# Altium PCB PCB_PDB_OFA_v2.PcbDoc
Units mm, origin at the board's own origin, x right, y up, seen from the top; angles counter-clockwise.
Board outline 60 x 90 mm, 2 copper layers (Top Layer, Bottom Layer); 81 components, 28 nets, 212 pads, 0 vias.
Unrouted connection lines stored in the file: 156.
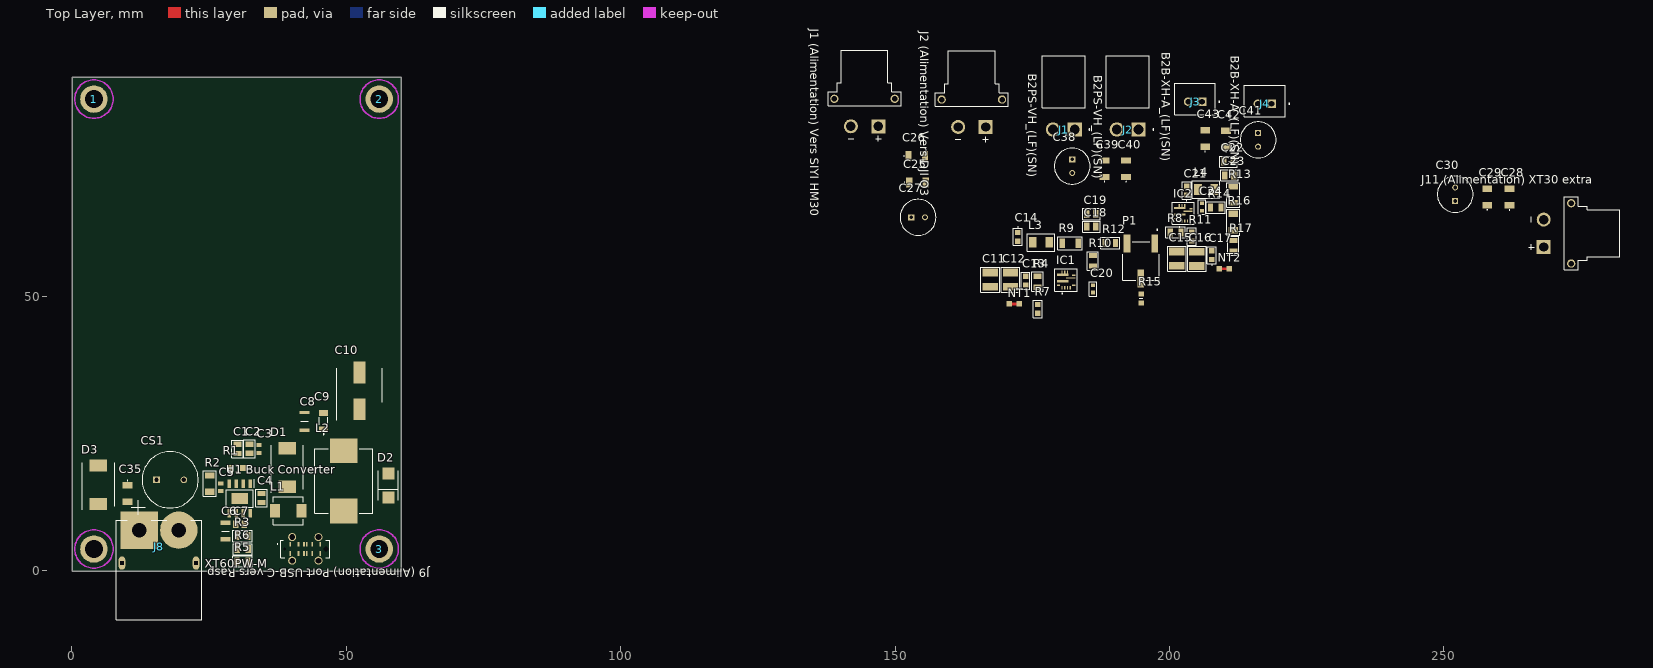
[diagram p0: Top Layer view]
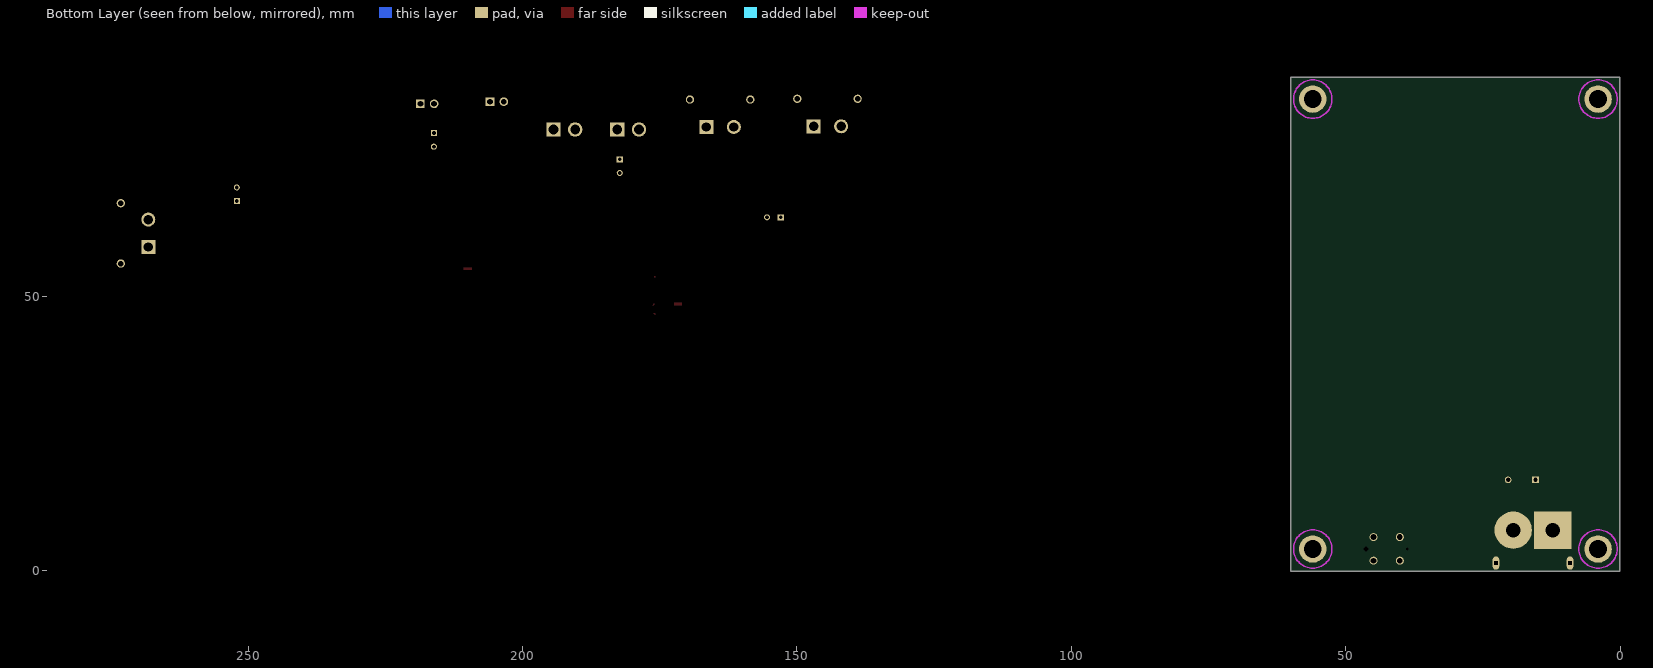
[diagram p1: Bottom Layer view, seen from below]

## Layer stack, top to bottom
Top Solder: solder mask 0.0102, Solder Resist, Dk 3.5
Top Layer: signal copper 0.0356
Dielectric 1: dielectric 0.32, FR-4, Dk 4.8
Bottom Layer: signal copper 0.0356
Bottom Solder: solder mask 0.0102, Solder Resist, Dk 3.5

## Board outline
60.005,-0.008 0.005,-0.008 0.005,89.992 60.005,89.992

## Design rules (kind name [scope] priority, off if disabled: settings)
Clearance [All] p1: gap=0.254 ignorepadtopadclearanceinfootprint=FALSE
PolygonConnect [All] p1: connectstyle=Relief reliefconductorwidth=0.254 reliefentries=4 polygonreliefangle="90 Angle" airgapwidth=0.254
RoutingVias [All] p1: holewidth=0.711 width=1.27 viastyle="Through Hole" minholewidth=0.711 minwidth=1.27 maxholewidth=0.711 maxwidth=1.27
SolderMaskExpansion [All] p1: expansion=0.102 istentingtop=FALSE
SupplyNets "Schematic Supply Nets" [InNet('PGND4')] p1: voltage=0.000
Width [All] p1: maxlimit=0.254 minlimit=0.254 preferedwidth=0.254
30 further rules are at their usual default settings.

## Components (designator, comment, footprint, x,y, rotation, side; value= is the part's Value field where it differs from the comment)
1 "Comment" "MH - Footprint" 4,86 r90 top
2 "Comment" "MH - Footprint" 56,86 r270 top
3 "Comment" "MH - Footprint" 56,4 r270 top
C1 "4.7 uF 50V" CAPC2012X145N 30.175,22.245 r270 top
C2 "4.7 uF 50V" CAPC2012X145N 32.35,22.275 r270 top
C3 "10nF 50V" CAPC1608X90N 34.1,22.24 r90 top
C4 "0.1uF 100V" CAPC2012X145N 34.525,13.3 r90 top
C5 "10nF 50V" CAPC1608X90N 27.1,15.25 r270 top
C6 "2200pF" CAPC3216X130N 28,7.25 r270 top
C7 "22 pF 50 V" CAPC2012X70N 30.625,8.525 r0 top
C8 "68uF" CAPC3216X180N 42.375,27.275 r90 top
C9 "100uF" GRM31x 45.85,27.325 r90 top
C10 "1000uF 6.3V" CAPAE830X1050N 52.4,32.825 r90 top
C11 "10uF" CAPC3225X280N 167.362,53.076 r90 top
C12 "10uF" CAPC3225X280N 171.045,53.076 r90 top
C13 "0.1uF" C0603 173.788,52.899 r90 top
C14 "0.1uF" C0603 172.389,60.9 r270 top
C15 "10uF" CAPC3225X280N 201.373,56.917 r90 top
C16 "10uF" CAPC3225X280N 205.03,56.892 r90 top
C17 "0.1uF" C0603 207.748,57.56 r90 top
C18 "22uF" CAPC2012X145N 185.775,62.754 r0 top
C19 "22uF" CAPC2012X145N 185.775,65.04 r0 top
C20 "100pF" GRM1885C1H101JA01D 186.054,51.426 r270 top
C21 "0.1uF" C0603 203.151,69.332 r90 top
C22 "22uF" CAPC2012X145N 210.771,74.59 r0 top
C23 "22uF" CAPC2012X145N 210.923,72.101 r0 top
C24 "100pF" GRM1885C1H101JA01D 205.919,66.31 r270 top
C25 "100nF" C1206 154.101,70.806 r0 top
C26 "4.7nF" C1206 153.974,75.632 r0 top
C27 "47uF 50V" CAPPRD250W50D655H1250 152.958,64.456 r0 top
C28 "100nF" C1206 262,68.164 r90 top
C29 "4.7nF" C1206 257.936,68.164 r90 top
C30 "47uF 50V" CAPPRD250W50D655H1250 252.094,67.402 r90 top
C35 "100nF" C1206 10.1,14.125 r270 top
C38 "47uF 50V" CAPPRD250W50D655H1250 182.297,75.033 r270 top
C39 "4.7nF" C1206 188.19,73.295 r90 top
C40 "100nF" C1206 192.127,73.295 r90 top
C41 "47uF 50V" CAPPRD250W50D655H1250 216.181,79.823 r270 top
C42 "4.7nF" C1206 210.339,78.757 r90 top
C43 "100nF" C1206 206.529,78.807 r90 top
CS1 "1000uF" CAPPRD500W60D1025H2150 15.4,16.6 r0 top
D1 "CDBC540-G" DIOM8059X290N 39.225,18.875 r90 top
D2 "6.0 V" SMBJ12A 57.675,15.6 r90 top
D3 "28V 1500W" DIOM7959X262N 4.8,15.725 r90 top
IC1 "TPS56637RPAR" TPS56637RPAR 181.18,53.026 r90 top
IC2 "TPS56637RPAR" TPS56637RPAR 202.555,65.178 r90 top
J1 "B2PS-VH_(LF)(SN)" JST_B2PS-VH_(LF)(SN) 180.771,80.458 r180 top
"J1 (Alimentation) Vers SIYI HM30" "XT30PW-F" AMASS_XT30PW-F 144.449,86.046 r0 top
J2 "B2PS-VH_(LF)(SN)" JST_B2PS-VH_(LF)(SN) 192.403,80.458 r180 top
"J2 (Alimentation) Vers DJI O3" "XT30PW-F" AMASS_XT30PW-F 164.007,85.919 r0 top
J3 "B2B-XH-A_(LF)(SN)" JST_B2B-XH-A_(LF)(SN) 204.687,86.046 r0 top
J4 "B2B-XH-A_(LF)(SN)" JST_B2B-XH-A_(LF)(SN) 217.387,85.665 r0 top
J8 "XT60PW-M" AMASS_XT60PW-M 15.86,1.437 r180 top
"J9 (Alimentation) Port USB-C vers Rasp" "USB4120-03-C" USB412003C 42.525,4.025 r0 top
"J11 (Alimentation) XT30 extra" "XT30PW-F" AMASS_XT30PW-F 273.227,61.535 r270 top
L1 "4.7uH" IND_ECS-MPIL0530-4R7MC 39.4,10.975 r0 top
L2 "22 uH" IND_104CDMCCDS_SUM 49.525,16.425 r90 top
L3 "3.3uH" INDM3225X240N 176.58,59.884 r0 top
L4 "3.3uH" INDM3225X240N 206.707,69.51 r180 top
NT1 "NetTie" NetTie 171.705,48.657 r180 top net-tie
NT2 "NetTie" NetTie 210.009,55.083 r180 top net-tie
P1 "50k" TRIM_3361P-1-503GLF 194.819,56.48 r270 top
R1 "536k" ERA6AEB101V 30.025,18.75 r180 top
R2 "100k" RESC3216X71N 25.1,15.9 r270 top
R3 "37.4k" RESC2012X50N 31.075,6.375 r0 top
R4 "169k" RESC2012X50N 175.947,52.721 r90 top
R5 "10.2k" RESC2012X50N 31.075,1.75 r180 top
R6 "1k96" RESC2012X50N 31.125,3.975 r0 top
R7 "36.1k" RESC1608X51N 175.998,47.768 r90 top
R8 "169k" RESC2012X50N 201.144,61.712 r180 top
R9 "49.9" RESC3016X65N 181.914,59.757 r180 top
R10 "20k" RESC2012X60N 186.054,56.506 r90 top
R11 "36.1k" RESC1608X51N 204.09,60.95 r90 top
R12 "42.7k" RESC2012X60N 189.231,59.782 r0 top
R13 "49.9" RESC3016X65N 211.634,68.545 r90 top
R14 "20k" RESC2012X60N 208.459,66.259 r0 top
R15 "7.5k" RESC1608X55N 194.845,49.66 r90 top
R16 "75k" RESC3216X75N 211.634,63.567 r90 top
R17 "10k" RESC2012X60N 211.66,59.259 r90 top
"U1 Buck Converter" "TPS54531DDAR" SOIC127P600X175-8N 30.6,13.2 r270 top
? "Comment" "MH - Footprint" 4,4 r90 top

## Footprints (in the part's own frame and the unit in brackets; to place one, negate y for a bottom-side part, rotate by r counter-clockwise, add the part's x,y. Pads: shape width x height; smd on the part's side, far side on the other; paste and mask are expansions set on the pad)
AMASS_XT30PW-F [mm]
  round 2.55 hole 1.7: N(-2.5,-5)
  rect 2.55x2.55 / inner round 2.55 / far side rect 2.55x2.55 hole 1.7: P(2.5,-5)
  round 1.508 hole 1: S1(5.5,0) S2(-5.5,0)
  silkscreen extent -6.65,-7.75 6.65,8.9, body extent -6.65,-6 6.65,8.9, height 5
AMASS_XT60PW-M [mm]
  rect 6.8x6.8 / inner round 6.8 / far side rect 6.8x6.8 hole 2.7: 1(3.6,-6)
  round 6.8 hole 2.7: 2(-3.6,-6)
  oval 1.2x2.4 hole 0.6 square: S1(6.75,0) S2(-6.75,0)
  silkscreen extent -7.75,-11.43 7.75,10.35, body extent -7.75,-7.85 7.75,10.35, height 8.4
C0603 [mm]
  rect 0.95x1 smd: 1(-0.8,0) 2(0.8,0)
  silkscreen extent -1.85,-0.8 1.58,0.8, body extent -0.87,-0.48 0.88,0.47, height 0.87
C1206 [mm]
  rect 1.15x1.8 smd: 1(-1.5,0) 2(1.5,0)
  silkscreen extent -2.4,-0.05 -2.3,0.05, body extent -1.7,-0.9 1.7,0.9, height 1.75
CAPAE830X1050N [mm]
  rect 4x2.15 smd: 1(-3.35,0) 2(3.35,0)
  silkscreen extent -5.35,-4.15 4.15,4.15, body extent -4.65,-4.25 4.65,4.25, height 10.5
CAPC1608X90N [mm]
  rect 0.73x0.94 smd: 1(-0.71,0) 2(0.71,0)
  body extent -0.8,-0.4 0.8,0.4, height 0.9
CAPC2012X70N [mm]
  rect 0.96x1.39 smd: 1(-0.79,0) 2(0.79,0)
  body extent -1,-0.63 1,0.63, height 0.7
CAPC2012X145N [mm]
  rect 0.97x1.47 smd: 1(-0.83,0) 2(0.83,0)
  silkscreen extent -1.6,-1.02 1.6,1.02, body extent -1,-0.63 1,0.63, height 1.45
CAPC3216X130N [mm]
  rect 0.82x1.82 smd: 1(-1.5,0) 2(1.5,0)
  silkscreen extent 0,-0.7 0,0.7, body extent -1.6,-0.8 1.6,0.8, height 1.3
CAPC3216X180N [mm]
  rect 0.62x1.82 smd: 1(-1.6,0) 2(1.6,0)
  silkscreen extent 0,-0.7 0,0.7, body extent -1.6,-0.8 1.6,0.8, height 1.6
CAPC3225X280N [mm]
  rect 1.43x2.82 smd: 1(-1.29,0) 2(1.29,0)
  silkscreen extent -2.3,-1.7 2.3,1.7, body extent -1.6,-1.25 1.6,1.25, height 2.8
CAPPRD250W50D655H1250 [mm]
  rect 1.1x1.1 hole 0.7: 1(0,0)
  round 1.1 hole 0.7: 2(2.5,0)
  silkscreen extent -2.02,-3.27 4.52,3.27, body extent -2.14,-3.4 4.65,3.4, height 12.5
CAPPRD500W60D1025H2150 [mm]
  rect 1.2x1.2 hole 0.8: 1(0,0)
  round 1.2 hole 0.8: 2(5,0)
  silkscreen extent -2.63,-5.12 7.63,5.12, body extent -2.75,-5.24 7.75,5.24, height 21.5
DIOM7959X262N [mm]
  rect 2.2x3.15 smd: 1(-3.5,0) 2(3.5,0)
  silkscreen extent -4.6,-2.95 3.97,2.95, body extent -3.97,-2.95 3.97,2.95, height 2.31
DIOM8059X290N [mm]
  rect 2.3x3.15 smd: 1(-3.5,0) 2(3.5,0)
  silkscreen extent -4.65,-2.95 4,2.95, body extent -4,-2.95 4,2.95, height 2.9
ERA6AEB101V [mm]
  rect 1.15x1.15 smd: 1(-1.175,0) 2(1.175,0)
  silkscreen extent -2.6,-0.63 0.2,0.63, body extent -1,-0.63 1,0.63, height 0.5
GRM31x [mm]
  rect 1.05x1.6 smd: 1(-1.475,0) 2(1.475,0)
  silkscreen extent -2.5,-0.8 0.7,0.8, body extent -1.6,-0.8 1.6,0.8, height 1
GRM1885C1H101JA01D [mm]
  rect 0.65x0.7 smd: 1(-0.675,0) 2(0.675,0)
  silkscreen extent -1.33,-0.67 1.33,0.67, body extent -0.8,-0.45 0.8,0.45, height 0.8
IND_104CDMCCDS_SUM [mm]
  rect 4.5x4.954 smd paste+0 mask+0: 1(-5.5,0) 2(5.5,0)
  silkscreen extent -5.88,-5.28 5.88,5.28, body extent -5.75,-5.16 5.75,5.16, height 3.99
IND_ECS-MPIL0530-4R7MC [mm]
  rect 1.8x2.5 smd: 1(-2.4,0) 2(2.4,0)
  silkscreen extent -2.75,-2.59 2.75,2.59, body extent -2.75,-2.59 2.75,2.59, height 3
INDM3225X240N [mm]
  rect 1.4x1.95 smd: 1(-1.5,0) 2(1.5,0)
  silkscreen extent -2.5,-1.6 2.5,1.6, body extent -1.6,-1.25 1.6,1.25, height 2.4
JST_B2B-XH-A_(LF)(SN) [mm]
  rect 1.575x1.575 / inner round 1.575 / far side rect 1.575x1.575 hole 1.05: 1(1.25,-0.525)
  round 1.575 hole 1.05: 2(-1.25,-0.525)
  silkscreen extent -3.7,-2.88 4.54,2.88, body extent -3.7,-2.88 3.7,2.88, height 7
JST_B2PS-VH_(LF)(SN) [mm]
  rect 2.625x2.625 / inner round 2.625 / far side rect 2.625x2.625 hole 1.75: 1(-1.98,0)
  round 2.625 hole 1.75: 2(1.98,0)
  silkscreen extent -4.78,-13.4 3.93,0.1, body extent -3.93,-14.9 3.93,0.57, height 8.5
"MH - Footprint" [mm]
  round 5 hole 3.25: MH(0,0)
  Keep-Out Layer circle w0.254: c0,0 r3.5
NetTie [mm]
  rect 1x1 smd mask-10: 1(-0.9,0) 2(0.9,0)
  Top Layer region: -0.75,-0.25 0.75,-0.25 0.75,0.25 -0.75,0.25
RESC1608X51N [mm]
  rect 0.95x1 smd: 1(-0.8,0) 2(0.8,0)
  silkscreen extent -1.58,-0.8 1.58,0.8, body extent -0.81,-0.41 0.81,0.41, height 0.51
RESC1608X55N [mm]
  rect 0.9x1 smd: 1(-0.8,0) 2(0.8,0)
  silkscreen extent 0,-0.33 0,0.33, body extent -0.8,-0.4 0.8,0.4, height 0.45
RESC2012X50N [mm]
  rect 0.95x1.45 smd: 1(-1,0) 2(1,0)
  silkscreen extent -1.78,-1.02 1.78,1.02, body extent -1.02,-0.63 1.02,0.63, height 0.5
RESC2012X60N [mm]
  rect 0.9x1.45 smd: 1(-0.95,0) 2(0.95,0)
  silkscreen extent -1.7,-1.02 1.7,1.02, body extent -1,-0.63 1,0.63, height 0.6
RESC3016X65N [mm]
  rect 1x1.75 smd: 1(-1.45,0) 2(1.45,0)
  silkscreen extent -2.25,-1.17 2.25,1.17, body extent -1.52,-0.78 1.53,0.77, height 0.55
RESC3216X71N [mil]
  rect 44x69 smd: 1(-58,0) 2(58,0)
  silkscreen extent -92,-46 92,46, body extent -61,-31 61,31, height 24
RESC3216X75N [mm]
  rect 1.2x1.8 smd: 1(-1.5,0) 2(1.5,0)
  silkscreen extent -2.4,-1.2 2.4,1.2, body extent -1.6,-0.8 1.6,0.8, height 0.75
SMBJ12A [mm]
  rect 2.2x2.15 smd: 1(-2.2,0) 2(2.2,0)
  silkscreen extent -2.68,-1.81 2.68,1.81, body extent -2.68,-1.86 2.68,1.86, height 2.33
SOIC127P600X175-8N [mm]
  rect 1.525x0.65 smd: 1(-2.712,1.905) 2(-2.712,0.635) 3(-2.712,-0.635) 4(-2.712,-1.905) 5(2.712,-1.905) 6(2.712,-0.635) 7(2.712,0.635) 8(2.712,1.905)
  rect 2x3 smd: 9(0,0)
  silkscreen extent -3.47,-2.45 1.6,2.58, body extent -3,-2.45 3,2.45, height 1.75
TPS56637RPAR [mm]
  rect 0.6x0.25 smd mask+0: 1(-1.4,0.75) 2(-1.4,0.25) 3(-1.4,-0.25) 4(-1.4,-0.75)
  rect 0.25x0.6 smd mask+0: 5(-0.93,-1.4) 7(0.87,-1.4) 10(-0.93,1.4)
  rect 0.25x1.7 smd mask+0: 6(0.37,-0.85)
  rect 0.4x2.1 smd mask+0: 8(0.95,0.65) 9(-0.21,0.65)
  rect 0.56x0.25 smd mask+0: 11(1.42,-0.25) 12(1.42,0.25) 13(1.42,0.75)
  silkscreen extent -2.5,-2.02 2.02,2.02, body extent -1.55,-1.55 1.55,1.55, height 1
TRIM_3361P-1-503GLF [mm]
  rect 3.3x1.19 smd: 1(-3.2,2.54) 2(3.2,0) 3(-3.2,-2.54)
  silkscreen extent -5.8,-3.35 3.52,3.35, body extent -4.27,-3.35 4.27,3.35, height 5.84
USB412003C [mm]
  rect 0.3x0.87 smd: A1(-2.75,0.865) A4(-1.25,0.865) A6(-0.25,0.865) A7(0.25,0.865) A9(1.25,0.865) A12(2.75,0.865) B1(2.75,-0.865) B4(1.25,-0.865) B6(0.25,-0.865) B7(-0.25,-0.865) B9(-1.25,-0.865) B12(-2.75,-0.865)
  round 1.46 hole 1.04: MH1(-2.4,2.15) MH2(2.4,2.15) MH3(2.4,-2.15) MH4(-2.4,-2.15)
  round 0.26 hole 0.52 unplated: MH5(-3.75,0)
  round 0.445 hole 0.89 unplated: MH6(3.75,0)
  silkscreen extent -5.1,-1.58 4.47,1.58, body extent -4.47,-2.3 4.47,2.3, height 6.5

## Part data
C1 C2: library part GRM21BR61H475KE51L, "Capacitor", Manufacturer_Name="Murata Electronics", Mouser Part Number=81-GRM21BR61H475KE1L, Arrow Part Number=GRM21BR61H475KE51L, Arrow Price/Stock=https://www.arrow.com/en/products/grm21br61h475ke51l/murata-manufacturing?region=nac, Datasheet Link=https://search.murata.co.jp/Ceramy/image/img/A01X/G101/ENG/GRM21BR61H475KE51-01A.pdf, Height=1.45mm, Manufacturer_Part_Number=GRM21BR61H475KE51L, Mouser Price/Stock=https://www.mouser.co.uk/ProductDetail/Murata-Electronics/GRM21BR61H475KE51L?qs=eeBpzGFlv%252B%252BOtLzDC1PY6Q%3D%3D
C3 C5: library part CL10B103KB8NNNC, "Capacitor", Manufacturer_Name=SAMSUNG, Mouser Part Number=187-CL10B103KB8NNNC, Arrow Part Number=CL10B103KB8NNNC, Arrow Price/Stock=https://www.arrow.com/en/products/cl10b103kb8nnnc/samsung-electro-mechanics?utm_currency=USD&region=europe, Datasheet Link=https://product.samsungsem.com/mlcc/CL10B103KB8NNN.do, Height=0.9mm, Manufacturer_Part_Number=CL10B103KB8NNNC, Mouser Price/Stock=https://www.mouser.co.uk/ProductDetail/Samsung-Electro-Mechanics/CL10B103KB8NNNC?qs=349EhDEZ59pAsZxZjVI0UQ%3D%3D
C4: library part C2012X7R2A104K125AA, "Capacitor", Manufacturer_Name=TDK, Mouser Part Number=810-C2012X7R2A104K, Arrow Part Number=C2012X7R2A104K125AA, Arrow Price/Stock=https://www.arrow.com/en/products/c2012x7r2a104k125aa/tdk?region=europe, ClassName=PowerModul, Datasheet Link=https://product.tdk.com/info/en/catalog/datasheets/mlcc_commercial_midvoltage_en.pdf, Height=1.45mm, Manufacturer_Part_Number=C2012X7R2A104K125AA, Mouser Price/Stock=https://www.mouser.co.uk/ProductDetail/TDK/C2012X7R2A104K125AA?qs=NRhsANhppD9J0ZsT2%2Fo%2F7Q%3D%3D
C6: library part CGA5H4C0G2J222J115AA, "Capacitor 2200pF 630V", Manufacturer_Name=TDK, Datasheet Link=http://docs-europe.electrocomponents.com/webdocs/14e9/0900766b814e9125.pdf, Height=1.3mm, Manufacturer_Part_Number=CGA5H4C0G2J222J115AA
C7: library part CC0805JRNPO9BN220, "Capacitor", Manufacturer_Name=YAGEO, Mouser Part Number=603-CC805JRNPO9BN220, Datasheet Link=https://componentsearchengine.com/Datasheets/2/CC0805JRNPO9BN220.pdf, Height=0.7mm, Manufacturer_Part_Number=CC0805JRNPO9BN220, Mouser Price/Stock=https://www.mouser.co.uk/ProductDetail/YAGEO/CC0805JRNPO9BN220?qs=vTakOoo5QyK71b5vkghGmg%3D%3D
C8: library part C3216X5R0J686M160AB, "Capacitor de 68uF", Manufacturer_Name=TDK, Mouser Part Number=810-C3216X5R0J686M1B, Arrow Part Number=C3216X5R0J686M160AB, Arrow Price/Stock=https://www.arrow.com/en/products/c3216x5r0j686m160ab/tdk?utm_currency=USD&region=nac, Datasheet Link=https://product.tdk.com/info/en/catalog/datasheets/mlcc_commercial_midvoltage_en.pdf, Height=1.8mm, Manufacturer_Part_Number=C3216X5R0J686M160AB, Mouser Price/Stock=https://www.mouser.co.uk/ProductDetail/TDK/C3216X5R0J686M160AB?qs=xLDY6iXSiQYzVupG6zVrXw%3D%3D
C9: library part GRM31CR60J107KEA8L, "Capacitor", Manufacturer_Name="Murata Electronics", Mouser Part Number=81-GRM31CR60J107KE8L, Arrow Part Number=GRM31CR60J107KEA8L, Arrow Price/Stock=https://www.arrow.com/en/products/grm31cr60j107kea8l/murata-manufacturing?utm_currency=USD&region=europe, Datasheet Link=https://search.murata.co.jp/Ceramy/image/img/A01X/G101/ENG/GRM31CR60J107KEA8-01A.pdf, Height=1.25mm, Manufacturer_Part_Number=GRM31CR60J107KEA8L, Mouser Price/Stock=https://www.mouser.co.uk/ProductDetail/Murata-Electronics/GRM31CR60J107KEA8L?qs=pUKx8fyJudDzdyEEakAKPA%3D%3D
C10: library part UCD0J102MNL1GS, "Capacitor Polarised", Manufacturer_Name=Nichicon, Mouser Part Number=647-UCD0J102MNL1GS, Arrow Part Number=UCD0J102MNL1GS, Arrow Price/Stock=https://www.arrow.com/en/products/ucd0j102mnl1gs/nichicon, Datasheet Link=https://www.nichicon.co.jp/english/products/pdfs/e-ucd.pdf, Height=10.5mm, Manufacturer_Part_Number=UCD0J102MNL1GS, Mouser Price/Stock=https://www.mouser.co.uk/ProductDetail/Nichicon/UCD0J102MNL1GS?qs=c0uEScvPYN2yS0opD8R0vQ%3D%3D
C11 C12 C15 C16: library part AGC1210X7R500-106KNE, "Capacitor", Manufacturer_Name=Venkel, Datasheet Link=https://data.venkel.com/documents/agc-series?force=1, Height=2.8mm, Manufacturer_Part_Number=AGC1210X7R500-106KNE
C13 C14 C17 C21: library part C0603C104K5RACTU, "Capacitor", Manufacturer_Name=KEMET, Mouser Part Number=80-C0603C104K5R, Arrow Part Number=C0603C104K5RACTU, Arrow Price/Stock=https://www.arrow.com/en/products/c0603c104k5ractu/kemet-corporation?utm_currency=USD&region=nac, Datasheet Link=https://content.kemet.com/datasheets/KEM_C1002_X7R_SMD.pdf, Height=0.87mm, Manufacturer_Part_Number=C0603C104K5RACTU, Mouser Price/Stock=https://www.mouser.co.uk/ProductDetail/KEMET/C0603C104K5RACTU?qs=l5k%252BbMnNDkkVcnZPSAaaiQ%3D%3D
C18 C19 C22 C23: library part C2012X5R1V226M125AC, "Capacitor, 35V", Manufacturer_Name=TDK, Mouser Part Number=810-C2012X5R1V226MAC, Arrow Part Number=C2012X5R1V226M125AC, Arrow Price/Stock=https://www.arrow.com/en/products/c2012x5r1v226m125ac/tdk?utm_currency=USD&region=nac, Datasheet Link=https://product.tdk.com/info/en/catalog/datasheets/mlcc_commercial_midvoltage_en.pdf, Height=1.45mm, Manufacturer_Part_Number=C2012X5R1V226M125AC, Mouser Price/Stock=https://www.mouser.co.uk/ProductDetail/TDK/C2012X5R1V226M125AC?qs=6JAMGB%252BEdkyUk0d2Mu2IrQ%3D%3D
C20 C24: library part GRM1885C1H101JA01D, "Capacitor", Manufacturer_Name="Murata Electronics", Mouser Part Number=81-GRM39C101J50, Arrow Part Number=GRM1885C1H101JA01D, Arrow Price/Stock=https://www.arrow.com/en/products/grm1885c1h101ja01d/murata-manufacturing?utm_currency=USD&region=europe, Datasheet Link=https://search.murata.co.jp/Ceramy/image/img/A01X/G101/ENG/GRM1885C1H101JA01-01A.pdf, Height=0.9mm, Manufacturer_Part_Number=GRM1885C1H101JA01D, Mouser Price/Stock=https://www.mouser.co.uk/ProductDetail/Murata-Electronics/GRM1885C1H101JA01D?qs=H3lwsW1hsDt1I4guwPQ00A%3D%3D
C25 C28 C35 C40 C43: library part C1206C104K1RACTU, "Capacitor, 100V max", Manufacturer_Name=KEMET, Mouser Part Number=80-C1206C104K1R, Arrow Part Number=C1206C104K1RACTU, Arrow Price/Stock=https://www.arrow.com/en/products/c1206c104k1ractu/kemet-corporation?region=nac, Datasheet Link=https://content.kemet.com/datasheets/KEM_C1002_X7R_SMD.pdf, Manufacturer_Part_Number=C1206C104K1RACTU, Mouser Price/Stock=https://www.mouser.co.uk/ProductDetail/KEMET/C1206C104K1RACTU?qs=zXJuHl05TF3PSnPdHxXWPA%3D%3D
C26 C29 C39 C42: library part C1206C472K5RACTU, "Capacitor, 50V max", Manufacturer_Name=KEMET, Mouser Part Number=80-C1206C472K5R, Arrow Part Number=C1206C472K5RACTU, Arrow Price/Stock=https://www.arrow.com/en/products/c1206c472k5ractu/kemet-corporation?utm_currency=USD&region=nac, Datasheet Link=https://content.kemet.com/datasheets/KEM_C1002_X7R_SMD.pdf, Manufacturer_Part_Number=C1206C472K5RACTU, Mouser Price/Stock=https://www.mouser.co.uk/ProductDetail/KEMET/C1206C472K5RACTU?qs=mFbQsTr%2Fh7%2F0OG5diKY6aA%3D%3D
C27 C30 C38 C41: library part 50YXJ47M6.3X11, "Capacitor Polarised, 47uF, 50V", Manufacturer_Name=Rubycon, Mouser Part Number=232-50YXJ47M6.3X11, Datasheet Link=https://www.mouser.co.uk/datasheet/2/977/e_YXJ-1601195.pdf, Height=12.5mm, Manufacturer_Part_Number=50YXJ47M6.3X11, Mouser Price/Stock=https://www.mouser.co.uk/ProductDetail/Rubycon/50YXJ47M6.3X11?qs=T3oQrply3y9Y%2FB9KKPf5JQ%3D%3D
CS1: library part 35PX1000MEFC10X20, "Capacitor Polarised", Manufacturer_Name=Rubycon, Mouser Part Number=232-35PX1000MEFC10X2, Arrow Part Number=35PX1000MEFC10X20, Arrow Price/Stock=https://www.arrow.com/en/products/35px1000mefc10x20/rubycon?region=nac, Datasheet Link=https://www.rubycon.co.jp/wp-content/uploads/catalog-aluminum/PX.pdf, Height=21.5mm, Manufacturer_Part_Number=35PX1000MEFC10X20, Mouser Price/Stock=https://www.mouser.co.uk/ProductDetail/Rubycon/35PX1000MEFC10X20?qs=T3oQrply3y86%2F1qnNfO%252BAA%3D%3D
D1: "Diode", Manufacturer_Name="Comchip Technology", Mouser Part Number=750-CDBC540-G, Arrow Part Number=CDBC540-G, Arrow Price/Stock=https://www.arrow.com/en/products/cdbc540-g/comchip-technology?utm_currency=USD&region=nac, Datasheet Link=https://eu.mouser.com/datasheet/2/80/CDBC520-HF_Thru195340._CDBC5100-HF_RevB-1480991.pdf, Height=2.9mm, Manufacturer_Part_Number=CDBC540-G, Mouser Price/Stock=https://www.mouser.co.uk/ProductDetail/Comchip-Technology/CDBC540-G?qs=tw%252BuQ%2FB6PO2ExpPYY64Vzw%3D%3D
D2: library part SMBJ6.0A, "TVS Diode (Uni-directional)", Manufacturer_Name=STMicroelectronics, Datasheet Link=https://www.st.com/resource/en/datasheet/smbj12a.pdf, Height=2.45mm, Manufacturer_Part_Number=SMBJ6.0A
D3: library part SMCJ28A, "TVS Diode, 1500W, 28V", Manufacturer_Name=Bourns, Mouser Part Number=652-SMCJ28A, Arrow Part Number=SMCJ28A, Arrow Price/Stock=https://www.arrow.com/en/products/smcj28a/bourns?region=nac, Datasheet Link=https://componentsearchengine.com/Datasheets/2/SMCJ28A.pdf, Height=2.62mm, Manufacturer_Part_Number=SMCJ28A, Mouser Price/Stock=https://www.mouser.co.uk/ProductDetail/Bourns/SMCJ28A?qs=%252Bf8Cd6aE5bxVNvhMry4%2FeQ%3D%3D
IC1 IC2: "Integrated Circuit", Manufacturer_Name="Texas Instruments", Mouser Part Number=595-TPS56637RPAR, Arrow Part Number=TPS56637RPAR, Arrow Price/Stock=https://www.arrow.com/en/products/tps56637rpar/texas-instruments?utm_currency=USD&region=nac, Datasheet Link=https://www.ti.com/lit/gpn/TPS56637, Height=1mm, Manufacturer_Part_Number=TPS56637RPAR, Mouser Price/Stock=https://www.mouser.co.uk/ProductDetail/Texas-Instruments/TPS56637RPAR?qs=9r4v7xj2LnkQ0Y9HL0qmSA%3D%3D
J1 J2: "Connector Header Through Hole, Right Angle 2 position 0.156 (3.96mm)", Package=None, Check_prices=https://www.snapeda.com/parts/B2PS-VH%20(LF)(SN)/JST/view-part/?ref=eda, MF=JST, MP="B2PS-VH (LF)(SN)", SnapEDA_Link=https://www.snapeda.com/parts/B2PS-VH%20(LF)(SN)/JST/view-part/?ref=snap
"J1 (Alimentation) Vers SIYI HM30" "J2 (Alimentation) Vers DJI O3" "J11 (Alimentation) XT30 extra": "Socket; DC supply; XT30; female; PIN: 2; on PCBs; THT; yellow; 15A", Package=None, Check_prices=https://www.snapeda.com/parts/XT30PW-F/AMASS/view-part/?ref=eda, MF=amass, MP=XT30PW-F, SnapEDA_Link=https://www.snapeda.com/parts/XT30PW-F/AMASS/view-part/?ref=snap
J3 J4: "Connector Header Through Hole 2 position 0.098 (2.50mm)", Package=None, Check_prices=https://www.snapeda.com/parts/B2B-XH-A%20(LF)(SN)/JST+Sales+America+Inc./view-part/?ref=eda, MF="JST Sales", MP="B2B-XH-A (LF)(SN)", SnapEDA_Link=https://www.snapeda.com/parts/B2B-XH-A%20(LF)(SN)/JST+Sales+America+Inc./view-part/?ref=snap
J8: "Socket, DC supply, male, PIN: 2", Package=Package, Availability="Not in stock", Check_prices=https://www.snapeda.com/parts/XT60PW-M/AMASS/view-part/?ref=eda, MF=AMASS, MP=XT60PW-M, Price=None, SnapEDA_Link=https://www.snapeda.com/parts/XT60PW-M/AMASS/view-part/?ref=snap
"J9 (Alimentation) Port USB-C vers Rasp": "Connector", Manufacturer_Name="GCT (GLOBAL CONNECTOR TECHNOLOGY)", Mouser Part Number=640-USB4120-03-C, Datasheet Link=https://gct.co/connector/usb4120, Height=6.75mm, Manufacturer_Part_Number=USB4120-03-C, Mouser Price/Stock=https://www.mouser.co.uk/ProductDetail/GCT/USB4120-03-C?qs=KUoIvG%2F9IlZaAd13sVDhkQ%3D%3D
L1: library part ECS-MPIL0530-4R7MC, "4.7 µH Shielded Molded Inductor 5 A 60mOhm Max Nonstandard -", Package="ECS-MPIL0530-0-2 ECS", Check_prices=https://www.snapeda.com/parts/ECS-MPIL0530-4R7MC/ECS/view-part/?ref=eda, MF="ECS Inc.", MP=ECS-MPIL0530-4R7MC, SnapEDA_Link=https://www.snapeda.com/parts/ECS-MPIL0530-4R7MC/ECS/view-part/?ref=snap
L2: library part 104CDMCCDS-220MC, "Bobine de 22 uH, 5 A", Manufacturer_Name=Sumida, ComponentLink1Description=Datasheet, ComponentLink1URL=https://products.sumida.com/products/pdf/104CDMCCDS.pdf, Copyright="Copyright (C) 2025 Ultra Librarian. All rights reserved.", Manufacturer_Part_Number=104CDMCCDS-220MC, Type="Fixed Inductors"
L3 L4: library part NLV32T-3R3J-EF, "Inductor", Manufacturer_Name=TDK, Datasheet Link=https://product.tdk.com/system/files/dam/doc/product/inductor/inductor/smd/catalog/inductor_commercial_standard_nlv32-ef_en.pdf, Height=2.4mm, Manufacturer_Part_Number=NLV32T-3R3J-EF
NT1 NT2: "Net Tie"
P1: library part TRIM_3361P-1-503GLF, "Potentiometer 50k ohms", ComponentLink1Description="Manufacturer Link", ComponentLink1URL=https://www.digikey.ca/en/products/detail/bourns-inc/3361P-1-503GLF/1088375
R1: library part ERA-6AEB5363V, "Resistor", Manufacturer_Name=Panasonic, Manufacturer_Part_Number=ERA6AEB5363V, Datasheet Link=https://industrial.panasonic.com/cdbs/www-data/pdf/RDM0000/AOA0000C307.pdf, Height=0.6mm
R2: library part TNPW1206100KBEEA, "Resistor", Manufacturer_Name=Vishay, Mouser Part Number=71-TNPW1206100KBEEA, Arrow Part Number=TNPW1206100KBEEA, Arrow Price/Stock=https://www.arrow.com/en/products/tnpw1206100kbeea/vishay, Datasheet Link=http://componentsearchengine.com/Datasheets/1/TNPW1206100KBEEA.pdf, Manufacturer_Part_Number=TNPW1206100KBEEA, Mouser Price/Stock=https://www.mouser.co.uk/ProductDetail/Vishay-Dale/TNPW1206100KBEEA?qs=3e%2FgEgHITqD1A8tWsKQhKA%3D%3D
R3: library part CRCW080537K4FKEA, "Resistor", Manufacturer_Name=Vishay, Mouser Part Number=71-CRCW0805-37.4K-E3, Datasheet Link=http://www.vishay.com/docs/20035/dcrcwe3.pdf, Height=0.5mm, Manufacturer_Part_Number=CRCW080537K4FKEA, Mouser Price/Stock=https://www.mouser.co.uk/ProductDetail/Vishay-Dale/CRCW080537K4FKEA?qs=ofC1ORbyWJfwcxfoRR0MKw%3D%3D
R4 R6 R8: library part CRCW08051K96FKEA, "Resistor", Manufacturer_Name=Vishay, Mouser Part Number=71-CRCW08051K96FKEA, Arrow Part Number=CRCW08051K96FKEA, Arrow Price/Stock=https://www.arrow.com/en/products/crcw08051k96fkea/vishay?region=nac, Datasheet Link=http://www.vishay.com/docs/20035/dcrcwe3.pdf, Height=0.5mm, Manufacturer_Part_Number=CRCW08051K96FKEA, Mouser Price/Stock=https://www.mouser.co.uk/ProductDetail/Vishay-Dale/CRCW08051K96FKEA?qs=1CkV0QOCgMpA%2F6GTgXIN%2Fg%3D%3D
R5: library part CRCW080510K2FKEA, "Resistor", Manufacturer_Name=Vishay, Mouser Part Number=71-CRCW0805-10.2K-E3, Arrow Part Number=CRCW080510K2FKEA, Arrow Price/Stock=https://www.arrow.com/en/products/crcw080510k2fkea/vishay?region=nac, Datasheet Link=http://www.vishay.com/docs/20035/dcrcwe3.pdf, Height=0.5mm, Manufacturer_Part_Number=CRCW080510K2FKEA, Mouser Price/Stock=https://www.mouser.co.uk/ProductDetail/Vishay-Dale/CRCW080510K2FKEA?qs=LOX6nxTstibTXRK16X5NEQ%3D%3D
R7 R11: library part PTN0603E3612BST1, "Resistor", Manufacturer_Name=Vishay, Datasheet Link=http://www.vishay.com/docs/60026/ptn.pdf, Height=0.508mm, Manufacturer_Part_Number=PTN0603E3612BST1
R9 R13: library part RNCF1206TKY49R9, "Resistor", Manufacturer_Name="Stackpole Electronics", Mouser Part Number=708-RNCF1206TKY49R9, Arrow Part Number=RNCF1206TKY49R9, Arrow Price/Stock=https://www.arrow.com/en/products/rncf1206tky49r9/stackpole-electronics?region=nac, Datasheet Link=https://www.seielect.com/catalog/sei-rncf.pdf, Height=0.65mm, Manufacturer_Part_Number=RNCF1206TKY49R9, Mouser Price/Stock=https://www.mouser.co.uk/ProductDetail/SEI-Stackpole/RNCF1206TKY49R9?qs=IPgv5n7u5QbrkyDMq71eTQ%3D%3D
R10 R14: library part RK73H2ATTD2002F, "Resistor", Manufacturer_Name="KOA Speer", Mouser Part Number=660-RK73H2ATTD2002F, Datasheet Link=http://www.koaspeer.com/catimages/Products/RK73H/RK73H.pdf, Height=0.6mm, Manufacturer_Part_Number=RK73H2ATTD2002F, Mouser Price/Stock=https://www.mouser.com/Search/Refine.aspx?Keyword=660-RK73H2ATTD2002F
R12: library part RN73R2ATTD4272D25, Package=None, Availability=Unavailable, MP=RN73R2ATTD4272D25, Price=None
R15: library part RC0603FR-077K5L, "Resistor", Manufacturer_Name=KEMET, Mouser Part Number=603-RC0603FR-077K5L, Datasheet Link=http://www.yageo.com/documents/recent/PYu-RC0603_51_RoHS_L_v5.pdf, Height=0.55mm, Manufacturer_Part_Number=RC0603FR-077K5L, Mouser Price/Stock=https://www.mouser.co.uk/ProductDetail/Yageo/RC0603FR-077K5L/?qs=2cAdsCoAWREF%252BylA0TXaCQ%3D%3D
R16: library part CR1206-FX-7502ELF, "Resistor", Manufacturer_Name=Bourns, Mouser Part Number=652-CR1206FX-7502ELF, Datasheet Link=http://www.bourns.com/data/global/pdfs/CHPREZTR.pdf, Height=0.75mm, Manufacturer_Part_Number=CR1206-FX-7502ELF, Mouser Price/Stock=https://www.mouser.co.uk/ProductDetail/Bourns/CR1206-FX-7502ELF?qs=x5wsLs3ZZ83CFlrcVX0CWw%3D%3D
R17: library part CRCW080510K0FKEAHP, "Resistor", Manufacturer_Name=Vishay, Mouser Part Number=71-CRCW080510K0FKEAH, Arrow Part Number=CRCW080510K0FKEAHP, Arrow Price/Stock=https://www.arrow.com/en/products/crcw080510k0fkeahp/vishay?utm_currency=USD&region=europe, ClassName=PowerModul, Datasheet Link=https://componentsearchengine.com/Datasheets/1/CRCW08051R00FKEAHP.pdf, Height=0.6mm, Manufacturer_Part_Number=CRCW080510K0FKEAHP, Mouser Price/Stock=https://www.mouser.co.uk/ProductDetail/Vishay-Dale/CRCW080510K0FKEAHP?qs=FlFvgi4rxBybVOW6oiRQjA%3D%3D
"U1 Buck Converter": "Power Supply", Manufacturer_Name="Texas Instruments", Mouser Part Number=595-TPS54531DDAR, Arrow Part Number=TPS54531DDAR, Arrow Price/Stock=https://www.arrow.com/en/products/tps54531ddar/texas-instruments?utm_currency=USD&region=nac, Datasheet Link=http://www.ti.com/lit/gpn/tps54531, Height=1.7mm, Manufacturer_Part_Number=TPS54531DDAR, Mouser Price/Stock=https://www.mouser.co.uk/ProductDetail/Texas-Instruments/TPS54531DDAR?qs=jA5Ki6243onykODzUePbag%3D%3D

## Nets (pads, with @x,y where several pads share a name; then routed paths per layer and width w, separated by ;. In a path a pad name is that pad's centre, name@x,y a point inside that pad or via, vN(x,y) a via of type N, cw(c..) or ccw(c..) an arc to the next point about the centre after c; other vN are vias at no path point)
"+5 RASP": "J9 (Alimentation) Port USB-C vers Rasp.A4" "J9 (Alimentation) Port USB-C vers Rasp.A9" "J9 (Alimentation) Port USB-C vers Rasp.B4" "J9 (Alimentation) Port USB-C vers Rasp.B9" C10.1 D2.1 L2.2
AGND4: IC1.3 IC1.10 NT1.1 R7.1 R15.1 | length 0.2
  Top Layer w0.254: R7.1@175.871,46.79 175.998,46.917 R7.1
AGND5: IC2.3 IC2.10 NT2.1 R11.1 R17.1
NetC1_2: "J1 (Alimentation) Vers SIYI HM30.P" "J2 (Alimentation) Vers DJI O3.P" "J11 (Alimentation) XT30 extra.P" "U1 Buck Converter.2" C1.2 C2.2 C3.1 C11.2 C12.2 C13.2 C15.2 C16.2 C17.2 C25.2 C26.2 C27.1 C28.2 C29.2 C30.1 C35.2 CS1.1 D3.1 IC1.8 IC1.11 IC1.12 IC1.13 IC2.8 IC2.11 IC2.12 IC2.13 J8.1 R1.1 R4.2 R8.2 | length 0.2
  Top Layer w0.254: R4.2@175.896,53.508 175.947,53.559 R4.2
NetC4_1: "U1 Buck Converter.8" C4.1 D1.1 L1.1
NetC4_2: "U1 Buck Converter.1" C4.2
NetC5_1: "U1 Buck Converter.4" C5.1
NetC6_1: "U1 Buck Converter.6" C6.1 C7.1
NetC6_2: C6.2 R3.1
NetC8_1: C8.1 C9.1 L1.2 L2.1 R5.1
NetC14_1: C14.1 IC1.7
NetC14_2: C14.2 IC1.6 L3.2
NetC18_2: C18.2 C19.2 C38.1 C39.2 C40.2 J1.1 J2.1 L3.1 R9.2
NetC20_1: C20.1 R10.2
NetC20_2: C20.2 IC1.2 P1.1 P1.2 R15.2
NetC21_1: C21.1 IC2.7
NetC21_2: C21.2 IC2.6 L4.2
NetC22_2: C22.2 C23.2 C41.1 C42.2 C43.2 J3.1 J4.1 L4.1 R13.2
NetC24_1: C24.1 R14.1
NetC24_2: C24.2 IC2.2 R16.1 R17.2
NetIC1_1: IC1.1 R4.1 R7.2 | length 0.3
  Top Layer w0.254: R7.2 176.112,48.568 R7.2@176.227,48.454
NetIC2_1: IC2.1 R8.1 R11.2
NetP1_3: P1.3 R12.1
NetR1_2: "U1 Buck Converter.3" R1.2 R2.1
NetR5_2: "U1 Buck Converter.5" R5.2 R6.1
NetR9_1: R9.1 R10.1 R12.2
NetR13_1: R13.1 R14.2 R16.2
PGND4: "J1 (Alimentation) Vers SIYI HM30.N" "J2 (Alimentation) Vers DJI O3.N" "J9 (Alimentation) Port USB-C vers Rasp.A1" "J9 (Alimentation) Port USB-C vers Rasp.A12" "J9 (Alimentation) Port USB-C vers Rasp.B1" "J9 (Alimentation) Port USB-C vers Rasp.B12" "J9 (Alimentation) Port USB-C vers Rasp.MH1" "J9 (Alimentation) Port USB-C vers Rasp.MH2" "J9 (Alimentation) Port USB-C vers Rasp.MH3" "J9 (Alimentation) Port USB-C vers Rasp.MH4" "J11 (Alimentation) XT30 extra.N" "U1 Buck Converter.7" "U1 Buck Converter.9" C1.1 C2.1 C3.2 C5.2 C7.2 C8.2 C9.2 C10.2 C11.1 C12.1 C13.1 C15.1 C16.1 C17.1 C18.1 C19.1 C22.1 C23.1 C25.1 C26.1 C27.2 C28.1 C29.1 C30.2 C35.1 C38.2 C39.1 C40.1 C41.2 C42.1 C43.1 CS1.2 D1.2 D2.2 D3.2 IC1.9 IC2.9 J1.2 J2.2 J3.2 J4.2 J8.2 NT1.2 NT2.2 R2.2 R3.2 R6.2
pads on no net: 1.MH 2.MH 3.MH "J1 (Alimentation) Vers SIYI HM30.S1" "J1 (Alimentation) Vers SIYI HM30.S2" "J2 (Alimentation) Vers DJI O3.S1" "J2 (Alimentation) Vers DJI O3.S2" "J9 (Alimentation) Port USB-C vers Rasp.A6" "J9 (Alimentation) Port USB-C vers Rasp.A7" "J9 (Alimentation) Port USB-C vers Rasp.B6" "J9 (Alimentation) Port USB-C vers Rasp.B7" "J9 (Alimentation) Port USB-C vers Rasp.MH5" "J9 (Alimentation) Port USB-C vers Rasp.MH6" "J11 (Alimentation) XT30 extra.S1" "J11 (Alimentation) XT30 extra.S2" ?.MH IC1.4 IC1.5 IC2.4 IC2.5 J8.S1 J8.S2